# Altium PCB jetson_agx_breakout.PcbDoc
Units mil, origin at the board's own origin, x right, y up, seen from the top; angles counter-clockwise.
Board outline 2050 x 1337.5 mil, 2 copper layers (Top Layer, Bottom Layer); 23 components, 28 nets, 123 pads, 20 vias.
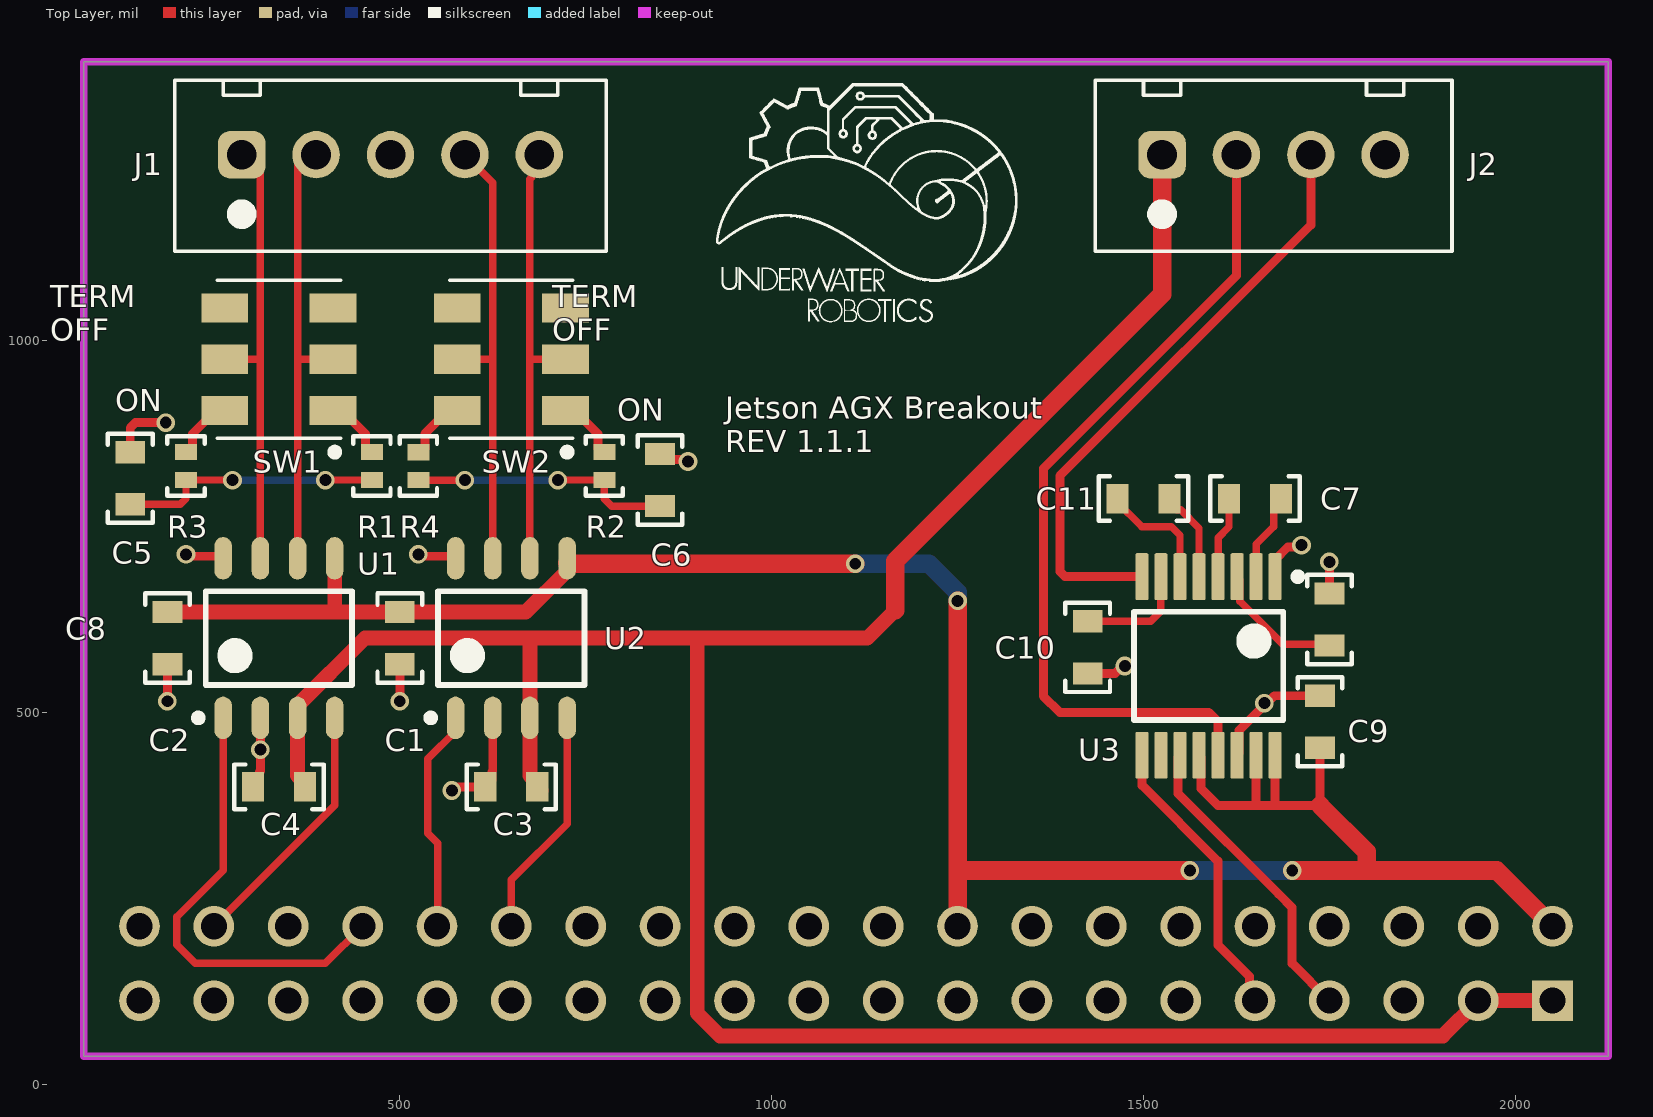
[diagram p0: Top Layer view]
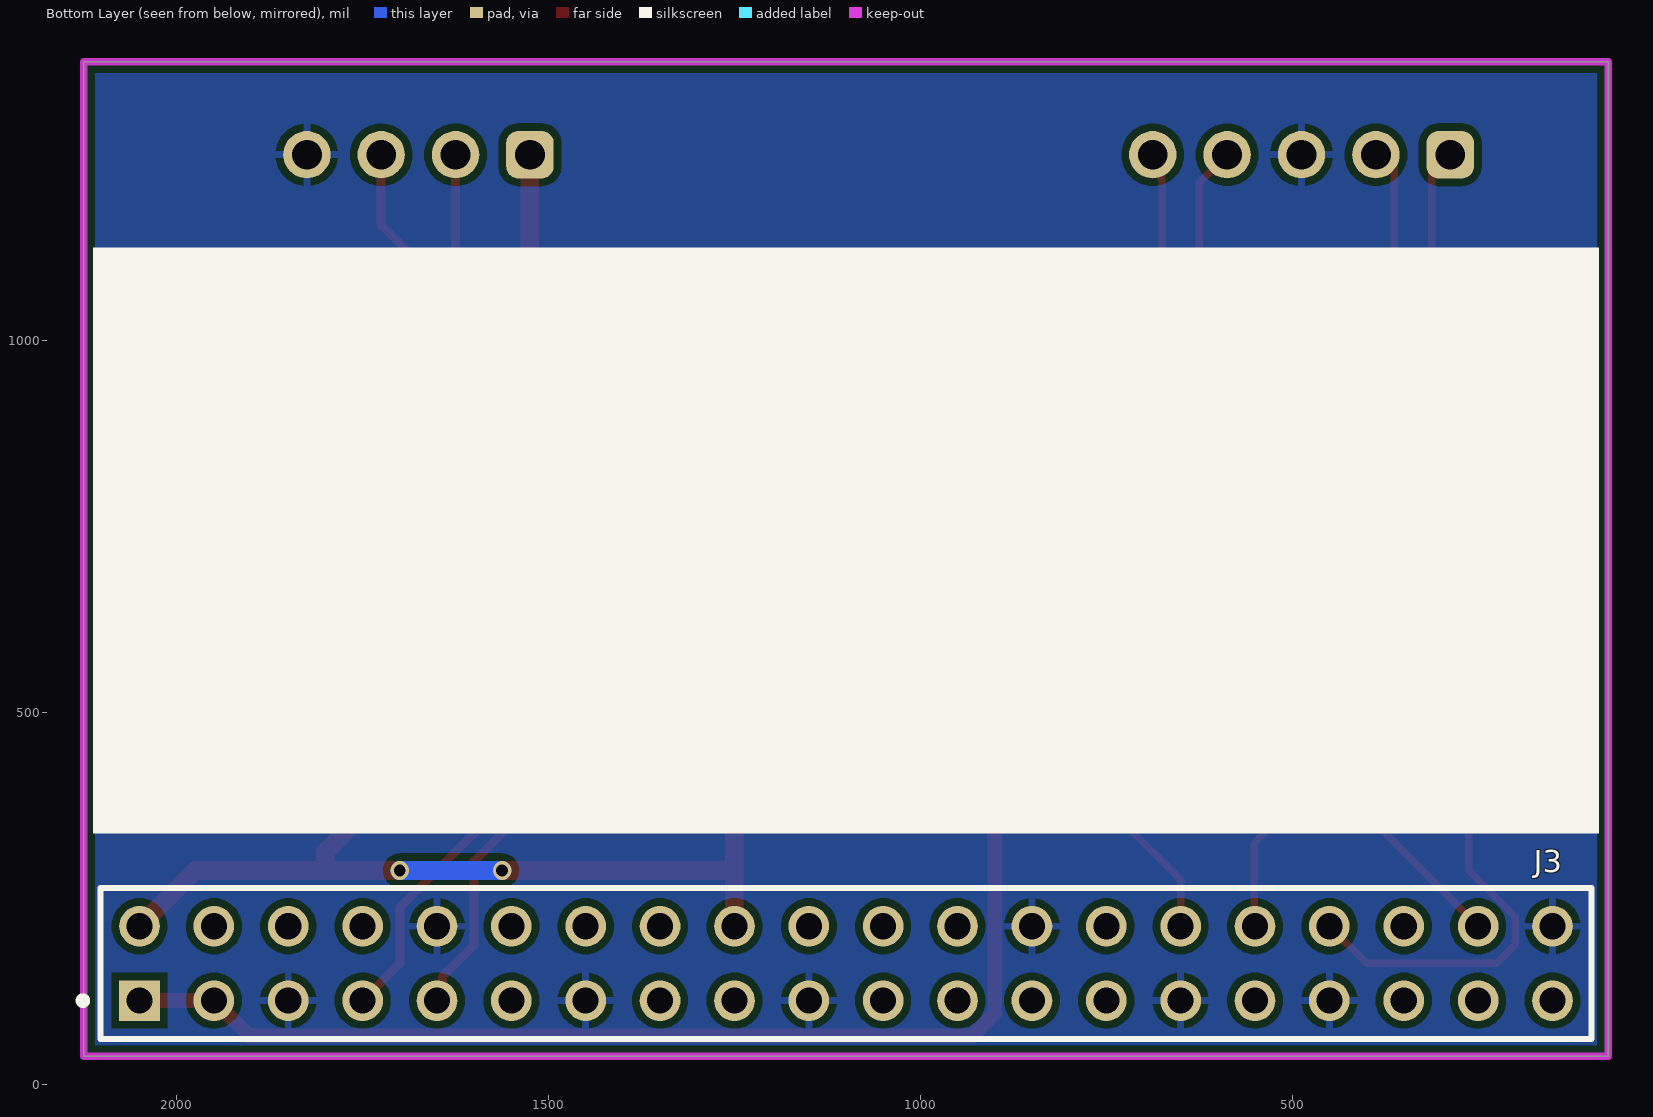
[diagram p1: Bottom Layer view, seen from below]
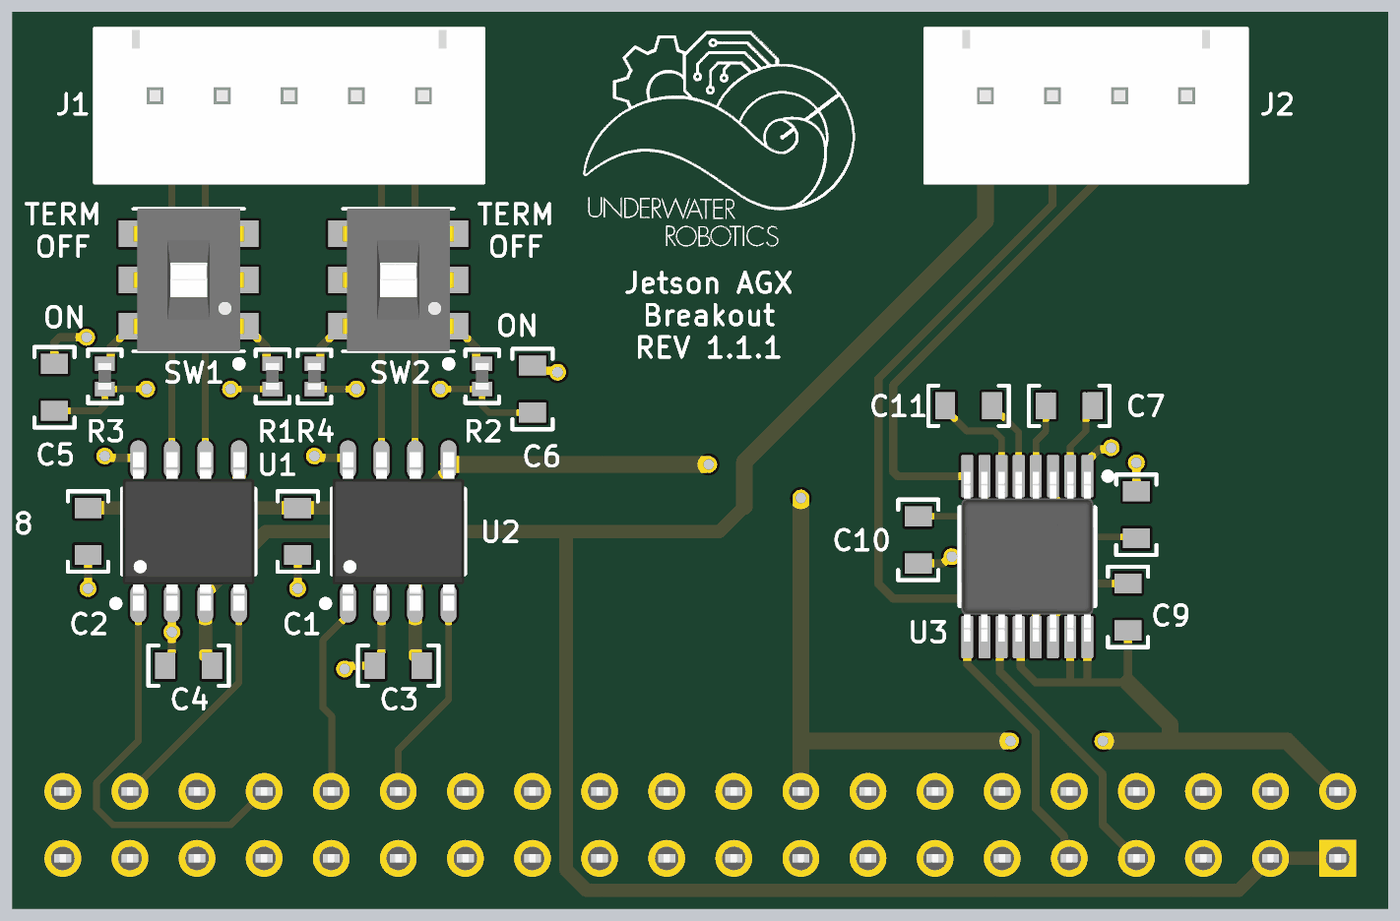
[diagram p2: 3D render of the assembled board from above, using the file's embedded part models]

## Layer stack, top to bottom
Top Solder: solder mask 0.4, Solder Resist, Dk 3.5
Top Layer: signal copper 1.4
Dielectric 1: dielectric 12.6, FR-4, Dk 4.8
Bottom Layer: signal copper 1.4
Bottom Solder: solder mask 0.4, Solder Resist, Dk 3.5

## Board outline
75,37.5 75,1375 2125,1375 2125,37.5

## Design rules (kind name [scope] priority, off if disabled: settings)
Clearance [All] p1: gap=10 ignorepadtopadclearanceinfootprint=FALSE except(0: Arc-Hole Track-Hole SMDPad-Hole THPad-Hole Via-Hole Fill-Hole Poly-Hole Region-Hole Text-Hole; 6: Arc-SMDPad Track-SMDPad SMDPad-SMDPad SMDPad-THPad SMDPad-Via SMDPad-Fill SMDPad-Poly SMDPad-Region)
MinimumSolderMaskSliver [All] p1: minsoldermaskwidth=7
PolygonConnect [All] p1: connectstyle=Relief reliefconductorwidth=10 reliefentries=4 polygonreliefangle="90 Angle" airgapwidth=10
RoomDefinition jetson_agx_breakout [InComponentClass('jetson_agx_breakout')] p1: confinementstyle=ConfineIn formatcopy=TRUE lockcomponents=FALSE outline -1000,-1000 1000,-1000 1000,0 -1000,0
RoutingVias [All] p1: holewidth=16 width=25 viastyle="Through Hole" minholewidth=16 minwidth=20 maxholewidth=28 maxwidth=50
SilkToSolderMaskClearance [IsPad] p1: minsilkscreentomaskgap=5 clearancetoexposedcopper=TRUE
SolderMaskExpansion [All] p1: expansion=4 istentingtop=FALSE
SupplyNets "Schematic Supply Nets_2" [InNet('3v3')] p1: voltage=0.000
SupplyNets "Schematic Supply Nets_1" [InNet('GND')] p2: voltage=0.000
SupplyNets "Schematic Supply Nets" [InNet('+5')] p3: voltage=0.000
Width [All] p1: maxlimit=50 minlimit=10 preferedwidth=10
28 further rules are at their usual default settings.

## Components (designator, comment, footprint, x,y, rotation, side; value= is the part's Value field where it differs from the comment)
C1 "1uF Ceramic 16V" CAPACITOR_0603 500,600 r270 top value=1uF
C2 "1uF Ceramic 16V" CAPACITOR_0603 187.5,600 r270 top value=1uF
C3 "10uF Ceramic 6.3V" CAPACITOR_0603 650,400 r180 top
C4 "10uF Ceramic 6.3V" CAPACITOR_0603 337.5,400 r180 top
C5 "10nF Ceramic 6.3V" CAPACITOR_0603 137.5,815 r270 top value=10nF
C6 "10nF Ceramic 6.3V" CAPACITOR_0603 850,812.5 r270 top value=10nF
C7 "100nF Ceramic 6.3V" CAPACITOR_0603 1650,787.5 r180 top value=0.1uF
C8 "100nF Ceramic 6.3V" CAPACITOR_0603 1750,625 r90 top value=0.1uF
C9 "100nF Ceramic 6.3V" CAPACITOR_0603 1737.5,487.5 r90 top value=0.1uF
C10 "100nF Ceramic 6.3V" CAPACITOR_0603 1425,587.5 r270 top value=0.1uF
C11 "100nF Ceramic 6.3V" CAPACITOR_0603 1500,787.5 r180 top value=0.1uF
J1 "XH2.54 VERT" CONN_JST_XH254_5POS_VERT 287.5,1250 r0 top
J2 "XH2.54 VERT" CONN_JST_XH254_4POS_VERT 1525,1250 r0 top
J3 "7-534206-0" FP-7-534206-0-MFG 1100,162.5 r180 bottom
R1 "60.4 Ohm 1% 1/16W" RESISTOR_0402 462.5,831.3 r270 top
R2 "60.4 Ohm 1% 1/16W" RESISTOR_0402 775,831.3 r270 top
R3 "60.4 Ohm 1% 1/16W" RESISTOR_0402 212.5,831.3 r270 top
R4 "60.4 Ohm 1% 1/16W" RESISTOR_0402 525,831.2 r270 top
SW1 "Switch DPDT" CAS-220TA 337.5,975 r90 top
SW2 "Switch DPDT" CAS-220TA 650,975 r90 top
U1 "CAN Transceiver" SOIC-8 337.5,600 r90 top
U2 "CAN Transceiver" SOIC-8 650,600 r90 top
U3 "SN65C3221EPWR" PW0016A_M 1587.5,562.5 r270 top

## Footprints (in the part's own frame and the unit in brackets; to place one, negate y for a bottom-side part, rotate by r counter-clockwise, add the part's x,y. Pads: shape width x height; smd on the part's side, far side on the other; paste and mask are expansions set on the pad)
CAPACITOR_0603 [mil] "CAPACITOR 0603"
  rect 30x40 smd: 1(-35,0) 2(35,0)
  silkscreen extent -60,-30 60,30, body extent -31,-16 32,16, height 31
CAS-220TA [mm] "SWITCH SLIDE DPDT 100MA 6V"
  rrect0% 1x1.6 smd: 1(-1.75,-1.85) 2(0,-1.85) 3(1.75,-1.85) 4(-1.75,1.85) 5(0,1.85) 6(1.75,1.85)
  silkscreen extent -3.3,-2.1 2.7,2.1, body extent -2.7,-2.1 2.7,2.1, height 2.51
CONN_JST_XH254_4POS_VERT [mm] "JST XH 2.54mm Pitch 4 Pos Vertical"
  rrect50% 1.62x1.62 hole 1.02: 1(0,0)
  round 1.62 hole 1.02: 2(2.54,0) 3(5.08,0) 4(7.62,0)
  silkscreen extent -2.29,-3.3 9.91,2.54, body extent -2.34,-3.35 9.96,2.49, height 7.21
CONN_JST_XH254_5POS_VERT [mm] "JST XH 2.54mm Pitch 5 Pos Vertical"
  rrect50% 1.62x1.62 hole 1.02: 1(0,0)
  round 1.62 hole 1.02: 2(2.54,0) 3(5.08,0) 4(7.62,0) 5(10.16,0)
  silkscreen extent -2.29,-3.3 12.45,2.54, body extent -2.34,-3.35 12.5,2.49, height 7.21
FP-7-534206-0-MFG [mm]
  rect 1.39x1.39 hole 0.89 paste-2539.97 mask+0: 1(-24.13,-1.27)
  round 1.39 hole 0.89 paste-2539.97 mask+0: 2(-24.13,1.27) 3(-21.59,-1.27) 4(-21.59,1.27) 5(-19.05,-1.27) 6(-19.05,1.27) 7(-16.51,-1.27) 8(-16.51,1.27) 9(-13.97,-1.27) 10(-13.97,1.27) 11(-11.43,-1.27) 12(-11.43,1.27) 13(-8.89,-1.27) 14(-8.89,1.27) 15(-6.35,-1.27) 16(-6.35,1.27) 17(-3.81,-1.27) 18(-3.81,1.27) 19(-1.27,-1.27) 20(-1.27,1.27) 21(1.27,-1.27) 22(1.27,1.27) 23(3.81,-1.27) 24(3.81,1.27) 25(6.35,-1.27) 26(6.35,1.27) 27(8.89,-1.27) 28(8.89,1.27) 29(11.43,-1.27) 30(11.43,1.27) 31(13.97,-1.27) 32(13.97,1.27) 33(16.51,-1.27) 34(16.51,1.27) 35(19.05,-1.27) 36(19.05,1.27) 37(21.59,-1.27) 38(21.59,1.27) 39(24.13,-1.27) 40(24.13,1.27)
  silkscreen extent -26.19,-2.58 25.47,2.58, body extent -25.4,-2.51 25.4,2.51, height 8.64
PW0016A_M [mm] "SOP, 16-Leads, Body 5.1x4.5mm, Pitch 0.65mm, IPC Low Density"
  rrect22% 1.6x0.45 smd: 1(-3.05,2.275) 2(-3.05,1.625) 3(-3.05,0.975) 4(-3.05,0.325) 5(-3.05,-0.325) 6(-3.05,-0.975) 7(-3.05,-1.625) 8(-3.05,-2.275) 9(3.05,-2.275) 10(3.05,-1.625) 11(3.05,-0.975) 12(3.05,-0.325) 13(3.05,0.325) 14(3.05,0.975) 15(3.05,1.625) 16(3.05,2.275)
  silkscreen extent -3.17,-2.55 1.85,3.17, body extent -3.21,-2.5 3.21,2.5, height 1
RESISTOR_0402 [mm] "Resistor 0402"
  rect 0.55x0.75 smd: 1(-0.475,0) 2(0.475,0)
  silkscreen extent -1.02,-0.64 1.02,0.64, body extent -0.5,-0.25 0.5,0.25, height 0.25
SOIC-8 [mm] "SOIC, 8-Leads, Body 4.90x3.90mm, Pitch 1.27mm, IPC Medium Density"
  oval 1.45x0.6 smd: 1(-2.725,1.905) 2(-2.725,0.635) 3(-2.725,-0.635) 4(-2.725,-1.905) 5(2.725,-1.905) 6(2.725,-0.635) 7(2.725,0.635) 8(2.725,1.905)
  silkscreen extent -2.85,-2.5 1.6,2.88, body extent -3,-2.5 3,2.5, height 1.75

## Part data
C1 C2: library part CAPACITOR_1uF_0603, "Cap 1uF 16V +/-10% / Ceramic 0603", Supplier Part Number 1=399-7847-1-ND, Tolerance="+/- 10%", Voltage=16V, Made By="Flip B", Supplier 1=Digi-Key
C3 C4: library part CAPACITOR_10uF_0603, "Cap 10uF 6.3V +/-20% / Ceramic 0603", Supplier Part Number 1=1276-1119-1-ND, Tolerance="+/- 20%", Value (uF)="10 uF", Voltage=6.3V, ComponentLink1Description=Digikey, ComponentLink1URL=https://www.digikey.com/en/products/detail/samsung-electro-mechanics/CL10A106MQ8NNNC/3886777, Made By="Flip B", Supplier 1=Digi-Key
C5 C6: library part CAPACITOR_0.01uF_0603, "Cap 10nF 6.3V +/-20% / Ceramic 0603", Supplier Part Number 1=80-C0603C103K9R, Tolerance="+/- 10%", Voltage=6.3V, ComponentLink1Description=Datsheet, ComponentLink1URL=https://www.mouser.com/datasheet/2/212/KEM_C1002_X7R_SMD-1102033.pdf, Made By="Flip B", Supplier 1=Mouser
C7 C8 C9 C10 C11: library part CAPACITOR_0.1uF_0603, "Cap 100nF 6.3V +/-10% / Ceramic 0603", Supplier Part Number 1=399-15351-1-ND, Tolerance="+/- 10%", Voltage=6.3V, ComponentLink1Description=Datsheet, ComponentLink1URL=https://www.mouser.com/datasheet/2/212/KEM_C1002_X7R_SMD-1102033.pdf, Made By="Flip B", Supplier 1=Digi-Key
J1: library part CONN_JST_XH254_5POS_VERT, "JST XH 2.54mm Pitch 5 Pos Vertical", Color=White, Current Per Pin=4A, Manufacturer=JST, ComponentLink1Description="Purchase Link", ComponentLink1URL=https://www.amazon.com/460PCS-XH2-54-Connector-Terminal-Connectors/dp/B09DBGVX5C, Configuration=Vertical, Created by="Robert P", NOTE="Do not use JST 2.5mm parts with this footprint. JST does not make 2.54mm pitch pins, rather only clones make this connector!", Number of Positions=5, Pitch=2.54mm, Series="XH 2.54"
J2: library part CONN_JST_XH254_4POS_VERT, "JST XH 2.54mm Pitch 4 Pos Vertical", Color=White, Current Per Pin=4A, Manufacturer=JST, ComponentLink1Description="Purchase Link", ComponentLink1URL=https://www.amazon.com/460PCS-XH2-54-Connector-Terminal-Connectors/dp/B09DBGVX5C, Configuration=Vertical, Created by="Robert P", NOTE="Do not use JST 2.5mm parts with this footprint. JST does not make 2.54mm pitch pins, rather only clones make this connector!", Number of Positions=4, Pitch=2.54mm, Series="XH 2.54"
J3: library part CMP-03369-000068-1, "CONN RCPT 40POS 0.1 GOLD PCB", Current Rating=2A, Manufacturer="TE Connectivity", Temperature="-65°C to +105°C", Temperature Range High=+105°C, Temperature Range Low=-65°C, Voltage Rating=333V, Automotive=No, Category=Conn, ComponentLink2Description=Datasheet, ComponentLink2URL=https://octopart.com/datasheet/7-534206-0-te+connectivity-39516831, Conn Gender=Female, Conn Orientation=Vertical, Contact Material=Gold,Nickel, Device Class L1=Connectors, Device Class L2="Headers and Wire Housings", Device Class L3=unset, Digikey Description="CONN RCPT 40POS 0.1 GOLD PCB", Footprint Url=https://www.mouser.in/datasheet/2/418/NG_CD_534206_R7-1252933.pdf, Height=8.9mm, Is Female=yes, Lead Free=Yes, Manufacturer Part Number=7-534206-0, Mouser Description="Headers & Wire Housings REC 2X20P VRT T/H", Number of Contacts=40, Number of Rows=2, Octopart=https://octopart.com/7-534206-0-te+connectivity-39516831, Package=7-534206-0, Pitch=2.54mm, RoHS=TRUE, Standoff Height=0.38mm
R1 R2 R3 R4: library part RESISTOR_60.4_0402, "RES 60.4 OHM 1% 1/16W 0402", Digikey Part Numer=CR0603-JW-104ELFTR-ND, Supplier Part Number 1=13-AC0402FR-0760R4LCT-ND, Tolerance="+/- 1%", Value  (Ohms)=60.4, Made By="Robert Pafford", Supplier=Digikey, Supplier 1=Digi-Key, Wattage=1/16W
SW1 SW2: library part CAS-220TA_CAN_TERM, "GOLD SWITCH FLUSH SLIDE DPDT 100MA 6V", Current Rating="100 mA", Supplier Part Number 1=CAS220JCT-ND, Voltage Rating=6VDC, Contact Finish=Gold, Made By="Robert Pafford", Supplier 1=Digi-Key, Switch Function=DPDT
U1 U2: library part TJA1442AT, "CAN Interface IC High-Speed CAN Transceiver with Standby Mode", Supplier Part Number 1=771-TJA1442AT/0Z, Made By="Robert Pafford", Max Data Rate=5Mbps, Supplier 1=Mouser
U3: library part CMP-0299-01595-2, "3-V to 5.5-V Single-Channel RS-232 1-Mbit/s Line Driver / Receiver with ±15-kV IEC ESD Protection, -40 to 85 degC, 16-Pin SSOP (DB), Green (RoHS & no Sb/Br)", Drivers Per Package=1, Supply Voltage(s)(V)="3.3 or 5.0", ComponentLink1Description="Manufacturer URL", ComponentLink1URL=www.ti.com, ComponentLink2Description=Datasheet, ComponentLink2URL=http://www.ti.com/general/docs/lit/getliterature.tsp?genericPartNumber=SN65C3221E&fileType=pdf, ComponentLink3Description="Package Specification", ComponentLink3URL=http://www.ti.com/litv/pdf/mpds361, DatasheetVersion=SLLS694B, ESD HBM(kV)=+/-15, ICC(Max)(mA)=1, IEC-61000-4-2 SUPPORT=TRUE, PackageDescription="16-Pin Plastic Thin Small Outline Package 5 x 4.4 mm Body ,0.65 mm Pitch", PackageReference=PW0016A, PackageVersion="revG, Feb-2011", Receivers Per Package=1, RS-232=TRUE, Single Supply=TRUE, SubFamily=RS-232

## Via types
v1: diameter 25, hole 16, Top Layer to Bottom Layer, 20 vias

## Nets (pads, with @x,y where several pads share a name; then routed paths per layer and width w, separated by ;. In a path a pad name is that pad's centre, name@x,y a point inside that pad or via, vN(x,y) a via of type N, cw(c..) or ccw(c..) an arc to the next point about the centre after c; other vN are vias at no path point)
3v3: C1.1 C2.1 C9.1 J3.2 J3.18 U1.5 U2.5 U3.12 U3.15 U3.16 | length 3021.5
  Top Layer w12: U3.12 1577.56,439.56 1577.56,397.44 1600,375 1650,375 ; U3.15 1651.48,376.48 1650,375 ; U3.16 1677.07,377.07 1675,375 ; C9.1 1737.5,375 1675,375 ; 1650,375 1675,375
  Top Layer w20: C2.1 412.5,635 ; U1.5 412.5,635 ; U2.5 725,700.69 725,690.55 669.45,635 C1.1 412.5,635
  Top Layer w25: U2.5@725,700.69 725.69,700 v1(1112.5,700) ; J3.18 1250,287.5 ; v1(1250,650) 1250,287.5 ; v1(1562.5,287.5) 1250,287.5 ; v1(1700,287.5) 1800,287.5 ; 1737.5,375 1800,312.5 1800,287.5 ; J3.2@2055.69,206.81 J3.2 1975,287.5 1800,287.5
  Bottom Layer w25: v1(1112.5,700) 1211.61,700 1250,661.61 v1(1250,650) ; v1(1562.5,287.5) v1(1700,287.5)
+5: C3.1 C4.1 J2.1 J3.1 J3.3 U1.3 U2.3 | length 3629.2
  Top Layer w20: C4.1@372.5,395 C4.1 ; C4.1@372.5,405 362.5,415 U1.3 362.5,509.45 453.05,600 675,600 ; C3.1@689.96,395.04 C3.1 685,405 675,415 U2.3 675,600 ; 1166,637.5 1128.5,600 900,600 ; J3.1 J3.3 1902.64,65.14 930.38,65.14 900,95.52 900,600 ; 675,600 737.5,600 800,600 900,600
  Top Layer w25: 1166,637.5 1166,703.5 1525,1062.5 J2.1
can0_din: J3.30 U2.4 | length 311.3
  Top Layer w10: J3.30 650,275 725,350 U2.4
can0_dout: J3.32 U2.1 | length 300.3
  Top Layer w10: J3.32@551,213.5 551,324 537.5,337.5 537.5,437.5 575,475 U2.1
can1_din: J3.38 U1.4 | length 359.9
  Top Layer w10: J3.38@241.26,203.76 412.5,375 U1.4
can1_dout: J3.34 U1.1 | length 612.2
  Top Layer w10: U1.1 262.5,287.5 200,225 200,187.5 225,162.5 400,162.5 J3.34
GND: C1.2 C2.2 C3.2 C4.2 C5.1 C6.1 C8.2 C9.2 C10.2 J1.3 J2.4 J3.5 J3.10 J3.13 J3.19 J3.26 J3.29 J3.33 J3.40 U1.2 U1.8 U2.2 U2.8 U3.1 U3.14 | length 899.6
  Top Layer w12: C5.1 137.5,882.63 144.53,889.66 v1(185.34,889.66) ; v1(187.5,515) C2.2 ; v1(212.5,712.5) 214.99,710.01 259.77,710.01 U1.8 ; C4.2 311.5,409 311.5,420.03 312.5,421.03 v1(312.5,450) ; v1@312.5,446.97 v1(312.5,450) ; U1.2 v1(312.5,450) ; v1(500,515) C1.2 ; v1(525,712.5) 527.49,710.01 572.27,710.01 U2.8 ; v1(570,395) 573.52,395 578.52,400 C3.2 624,409 624,420.03 625,421.03 U2.2 ; C6.1 857.51,839.99 885.01,839.99 v1(887.5,837.5) ; C10.2 1461.97,552.5 1471.97,562.5 v1(1475,562.5) ; U3.14 1628.74,445.28 1628.74,475.87 v1@1663.94,511.06 ; v1(1662.5,512.5) 1666.02,512.5 1676.02,522.5 C9.2 ; U3.1 1677.07,705.22 1694.36,722.51 1710.01,722.51 v1(1712.5,725) ; C8.2 v1(1750,702.5)
imu_pwr_ctrl: J3.21
NetC5_2: C5.2 R1.2 R3.2 | length 353.3
  Top Layer w10: C5.2 205,780 212.5,787.5 R3.2 212.55,812.55 v1(275,812.5) v1(275,812.5) ; v1(400,812.5) v1(400,812.5) 462.45,812.55 R1.2
  Bottom Layer w10: v1(275,812.5) v1(400,812.5)
NetC6_2: C6.2 R2.2 R4.2 | length 350.3
  Top Layer w10: R4.2@528.94,812.5 v1(587.5,812.5) ; v1(712.5,812.5) v1(712.5,812.5) 774.95,812.55 R2.2 775,787.5 785,777.5 C6.2
  Bottom Layer w10: v1(587.5,812.5) v1(712.5,812.5)
NetC7_1: C7.1 U3.2 | length 118.8
  Top Layer w10: U3.2 1651.48,726.48 1675,750 1675,777.5 C7.1
NetC7_2: C7.2 U3.4 | length 111
  Top Layer w10: U3.4 1600.3,734.99 1615,749.69 C7.2
NetC8_1: C8.1 U3.3 | length 179.6
  Top Layer w10: U3.3 1629.74,678.72 1629.74,649.54 1687.5,591.79 1748.21,591.79 C8.1
NetC10_1: C10.1 U3.7 | length 150.7
  Top Layer w10: C10.1 1510,622.5 1523.52,636.02 U3.7
NetC11_1: C11.1 U3.5 | length 124.3
  Top Layer w10: C11.1 1535,782.5 1545,772.5 1550,772.5 1574.7,747.8 U3.5
NetC11_2: C11.2 U3.6 | length 163.2
  Top Layer w10: C11.2 1465,782.5 1497.5,750 1537.5,750 1549.11,738.39 U3.6
NetJ1_1: J1.1 SW1.5 U1.7 | length 625.9
  Top Layer w10: SW1.5 312.5,975 ; J1.1@287.5,1275 312.5,1250 312.5,1150 U1.7
NetJ1_2: J1.2 SW1.2 U1.6 | length 625.9
  Top Layer w10: U1.6 362.5,1150 362.5,1250 J1.2@387.5,1275 ; 362.5,975 SW1.2
NetJ1_4: J1.4 SW2.5 U2.7 | length 606.1
  Top Layer w10: SW2.5 625,975 ; J1.4 625,1212.5 625,975 ; U2.7 625,975
NetJ1_5: J1.5 SW2.2 U2.6 | length 595.7
  Top Layer w10: U2.6 675,975 ; J1.5 677.21,1239.71 677.21,1219.46 675,1217.25 675,975 ; SW2.2 675,975
NetJ2_2: J2.2 U3.13 | length 1129.5
  Top Layer w12: U3.13 1600.3,487.2 1587.5,500 1387.5,500 1365.5,522 1365.5,828 1625,1087.5 J2.2
NetJ2_3: J2.3 U3.8 | length 813.5
  Top Layer w12: U3.8 1394.53,682.58 1387.5,689.61 1387.5,817.99 1725,1155.49 J2.3
NetR1_1: R1.1 SW1.1 | length 86.9
  Top Layer w12: SW1.1 422.15,906.1 453.74,874.51 453.74,854.83 458.56,850 R1.1
NetR2_1: R2.1 SW2.1 | length 86.9
  Top Layer w12: SW2.1 734.65,906.1 766.24,874.51 766.24,854.83 771.06,850 R2.1
NetR3_1: R3.1 SW1.4 | length 86.9
  Top Layer w12: R3.1 216.44,850 221.26,854.83 221.26,874.51 252.85,906.1 SW1.4
NetR4_1: R4.1 SW2.4 | length 87
  Top Layer w12: R4.1 528.94,849.9 533.76,854.73 533.76,874.51 565.35,906.1 SW2.4
uart_rx: J3.9 U3.9 | length 392.9
  Top Layer w12: U3.9 1498.09,442.26 1498.09,401.91 1600,300 1600,187.5 1642.42,145.08 1642.42,120.08 J3.9
uart_tx: J3.7 U3.11 | length 415.5
  Top Layer w12: U3.11 1546.26,439.56 1546.26,391.24 1681.64,255.86 1700,237.5 1700,162.5 J3.7
pads on no net: J3.4 J3.6 J3.8 J3.11 J3.12 J3.14 J3.15 J3.16 J3.17 J3.20 J3.22 J3.23 J3.24 J3.25 J3.27 J3.28 J3.31 J3.35 J3.36 J3.37 J3.39 SW1.3 SW1.6 SW2.3 SW2.6 U3.10

## Polygon pours and split planes (outlines as drawn)
GND on Bottom Layer "GND_L02_P000" (solid, pour order 0): 87.5,1362.5 87.5,50 2112.5,50 2112.5,1362.5

## Keep-outs
Keep-Out Layer:
  the board outline again, w10

## Silkscreen, mask and mechanical layers (free items; w line width, h text height)
Top Overlay:
  drawing of 19 lines, arcs and shapes, not listed
  text "TERM / OFF" at 30.04,1000 h30
  text "TERM / OFF" at 705.04,1000 h30
  text "ON" at 117.5,905 h30
  text "ON" at 792.5,892.5 h30
  text "Jetson AGX Breakout / REV 1.1.1" at 937.56,850 h30
Bottom Overlay:
  rectangle: 87.5,337.5 2112.5,1125